# Altium PCB S1.PcbDoc
Units mil, origin at the board's own origin, x right, y up, seen from the top; angles counter-clockwise.
Board outline 2570.51 x 2214.83 mil, 4 copper layers (Top Layer, PWR, GND, Bottom Layer), stack 23.756 mil thick; 77 components, 37 nets, 292 pads, 94 vias.
Unrouted connection lines stored in the file: 49.
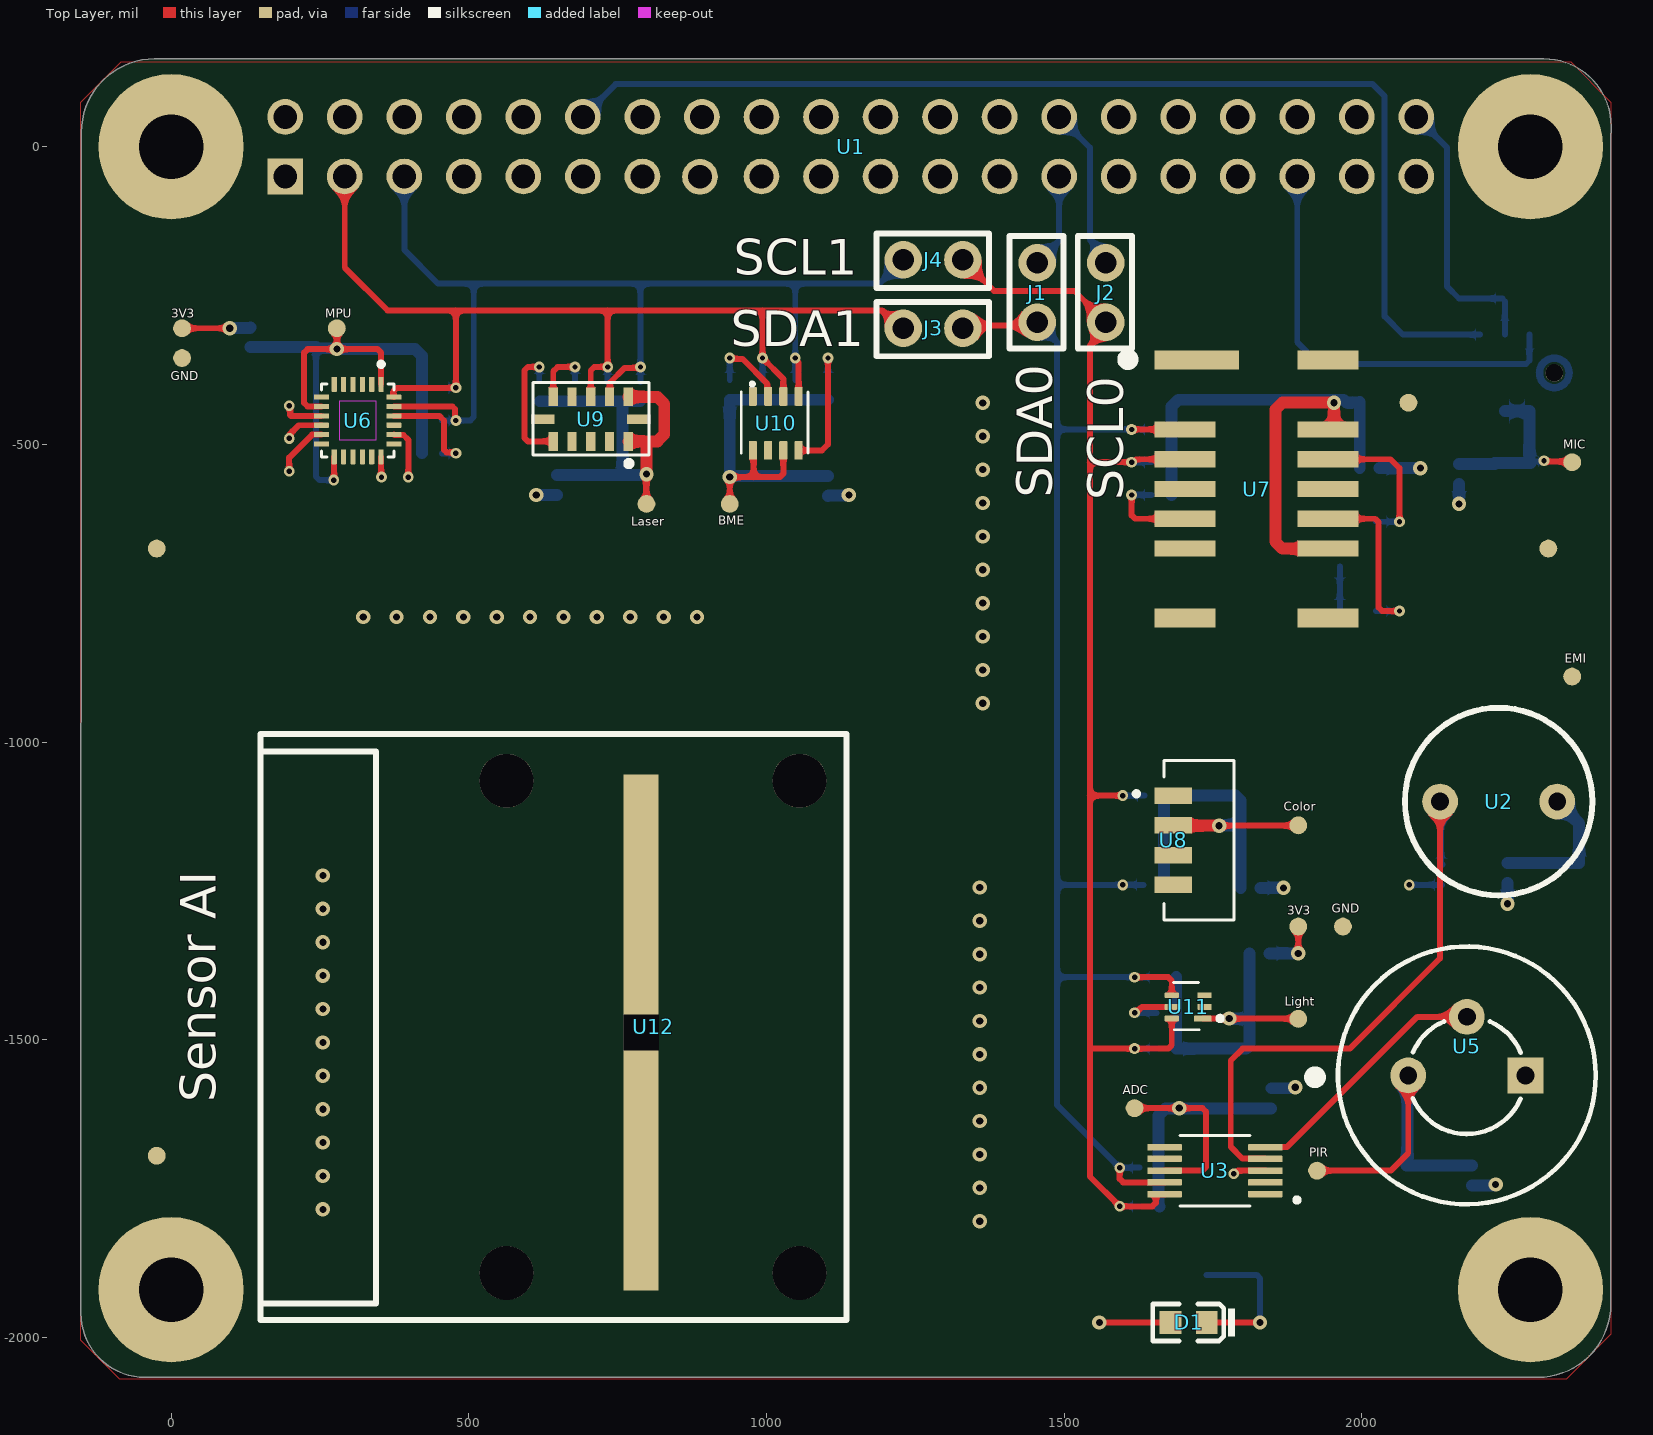
[diagram p0: Top Layer view]
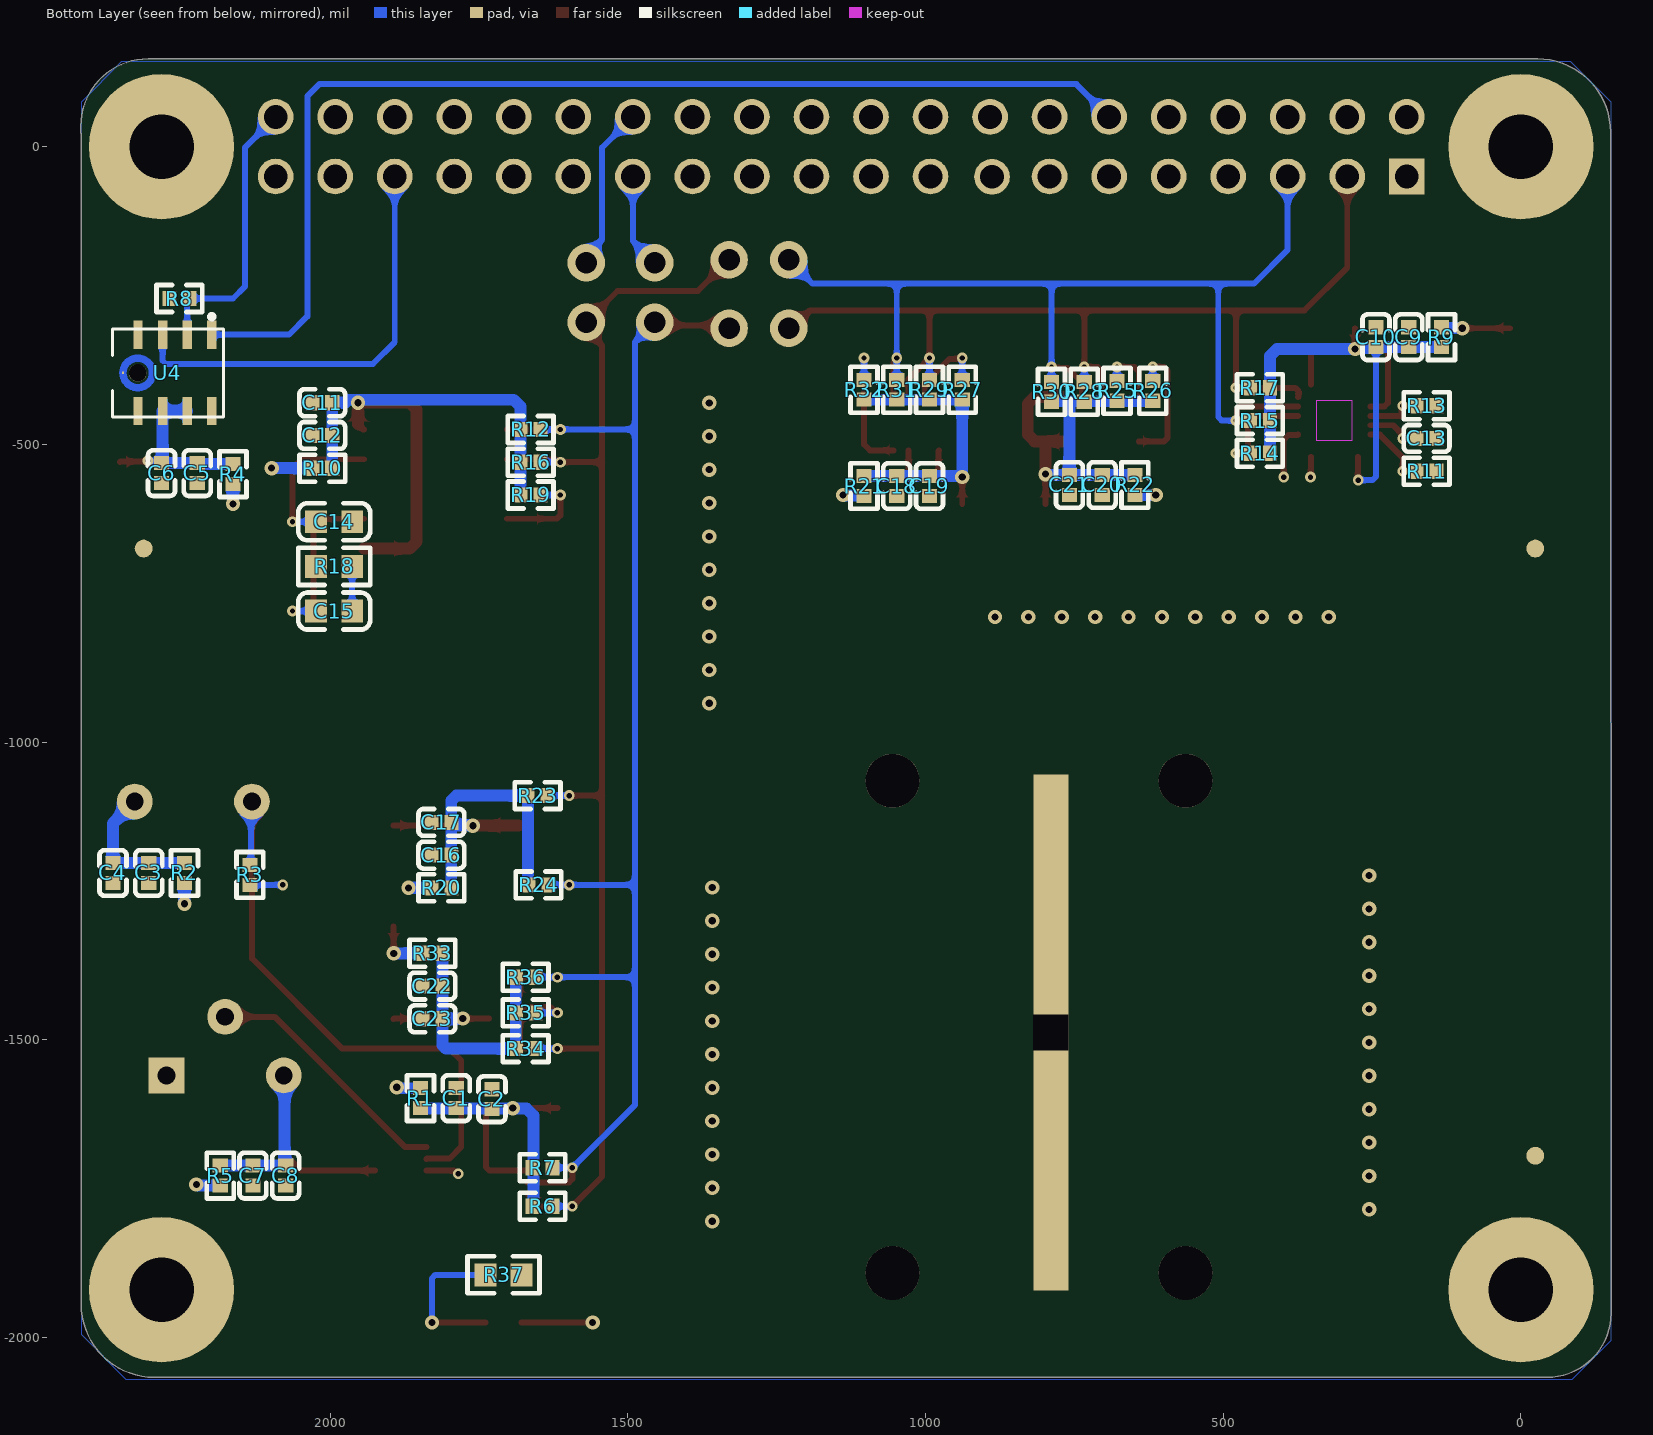
[diagram p1: Bottom Layer view, seen from below]
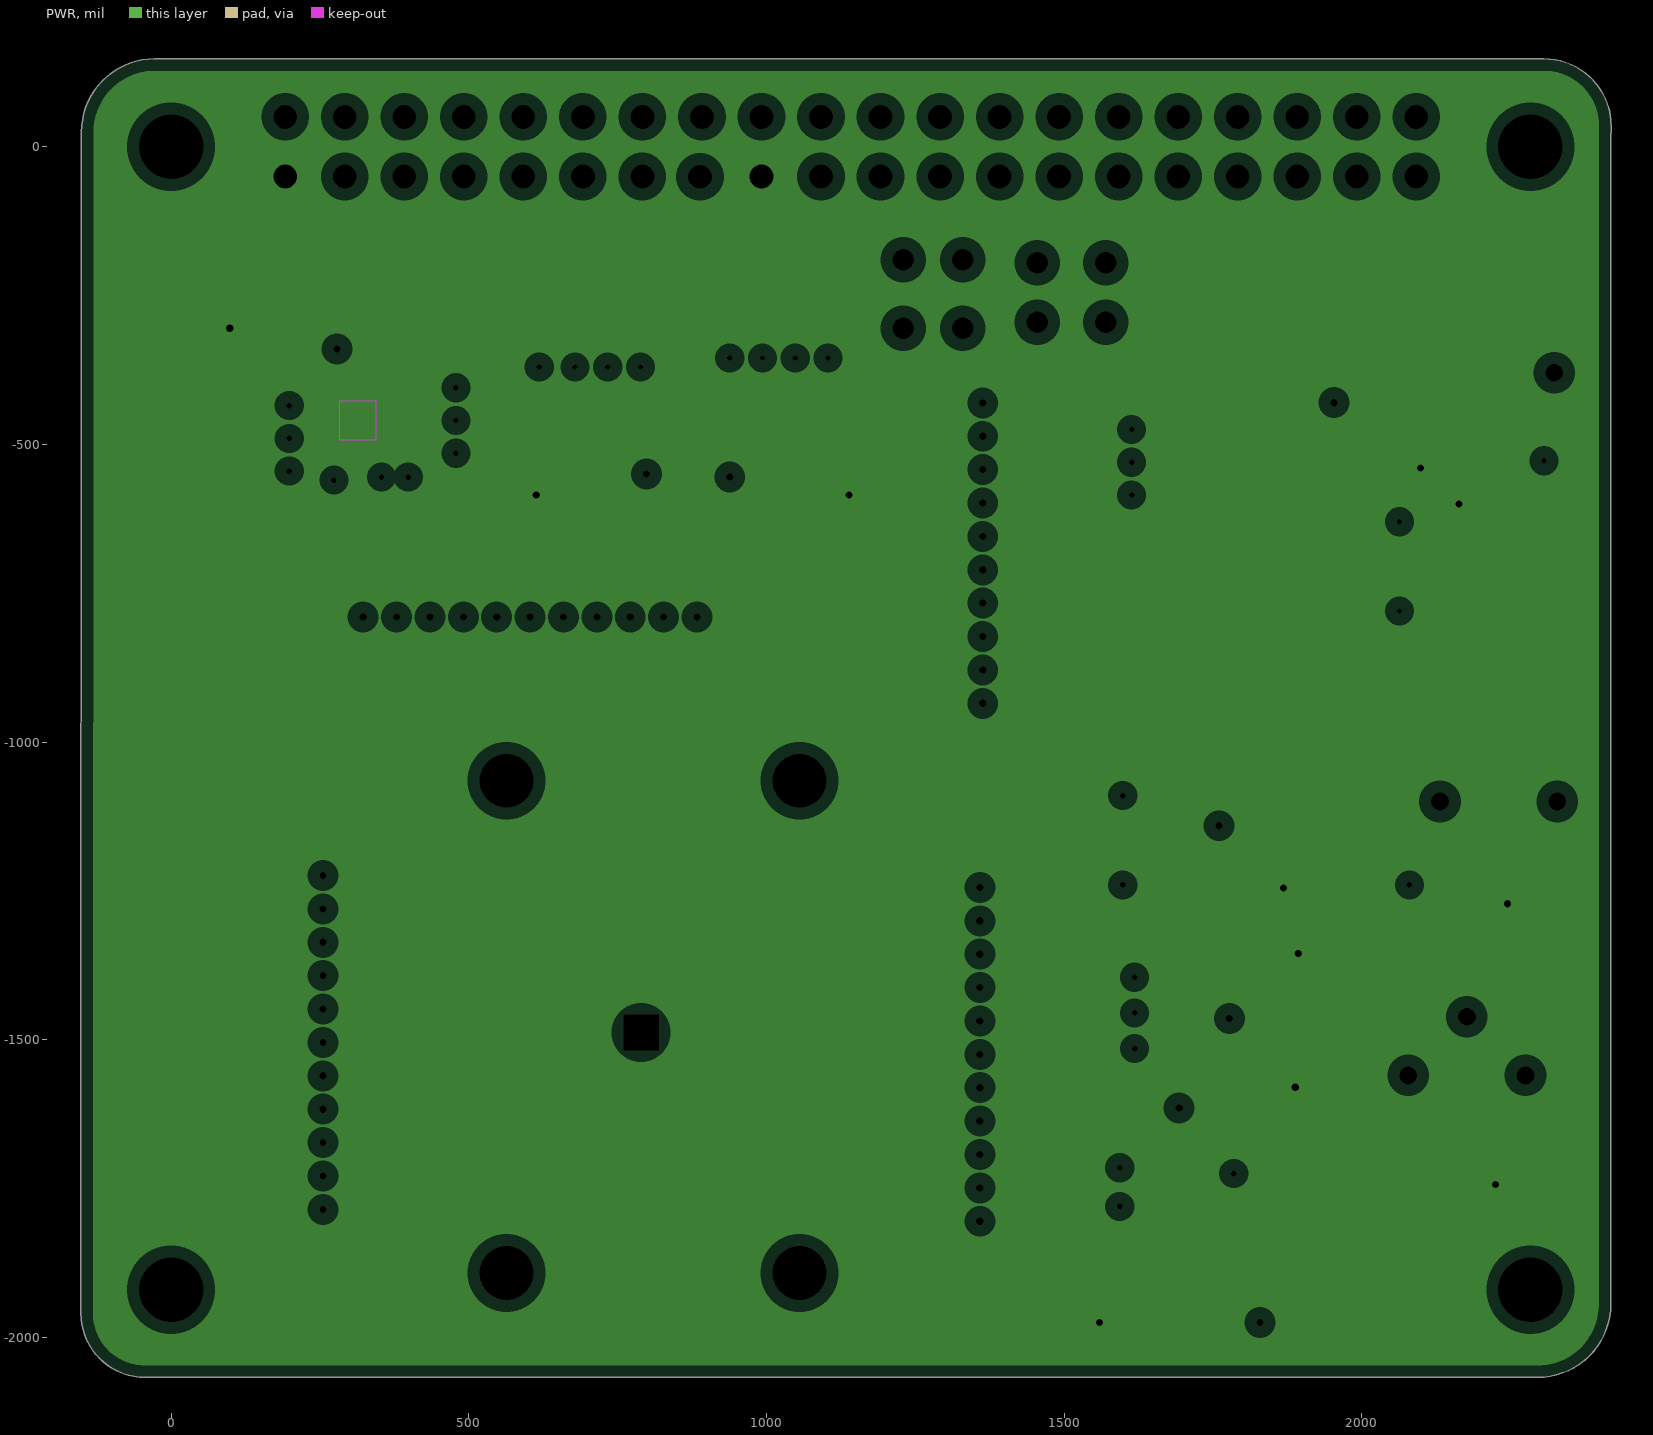
[diagram p2: PWR, clearances drawn from the general rule]
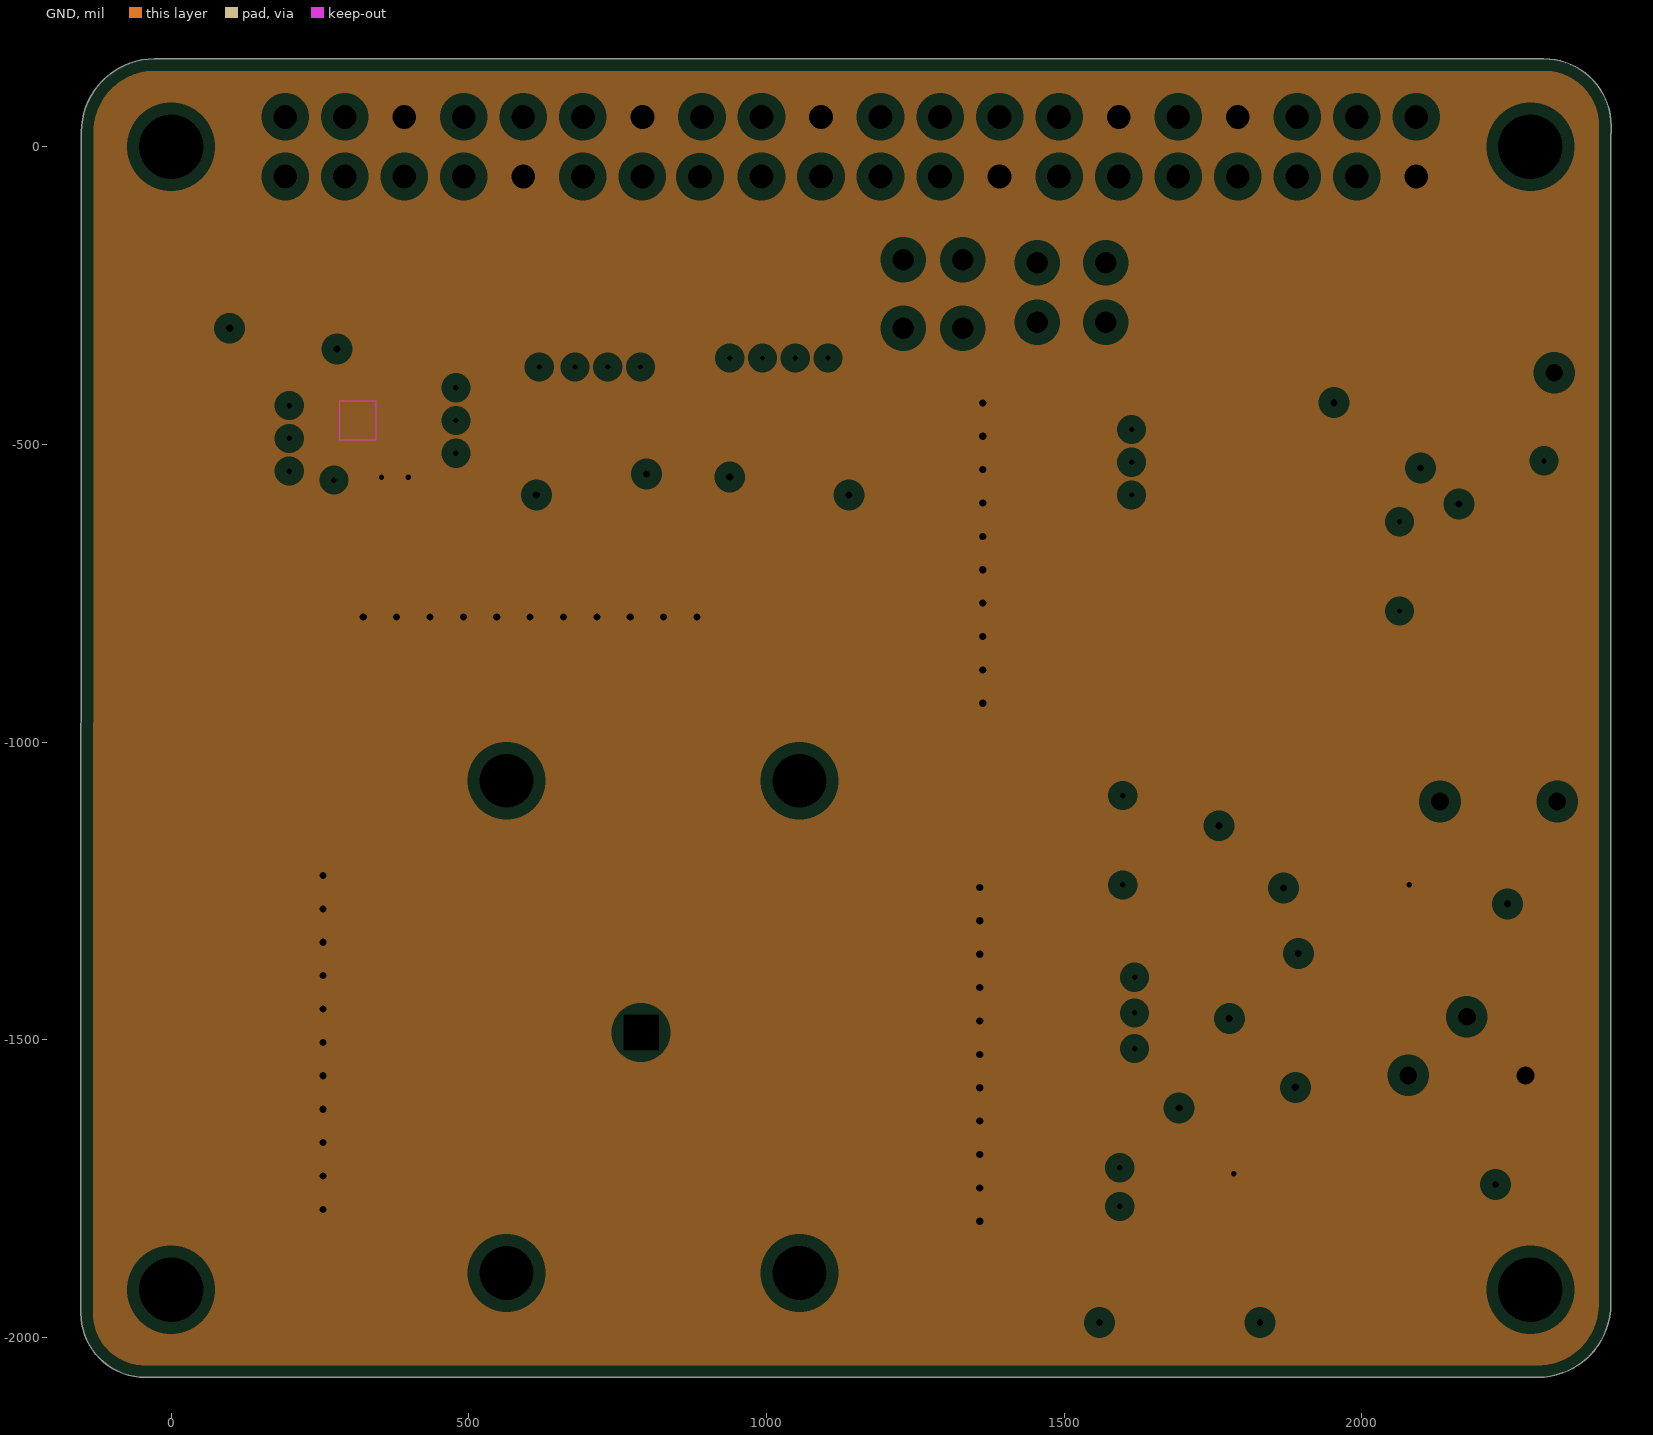
[diagram p3: GND, clearances drawn from the general rule]
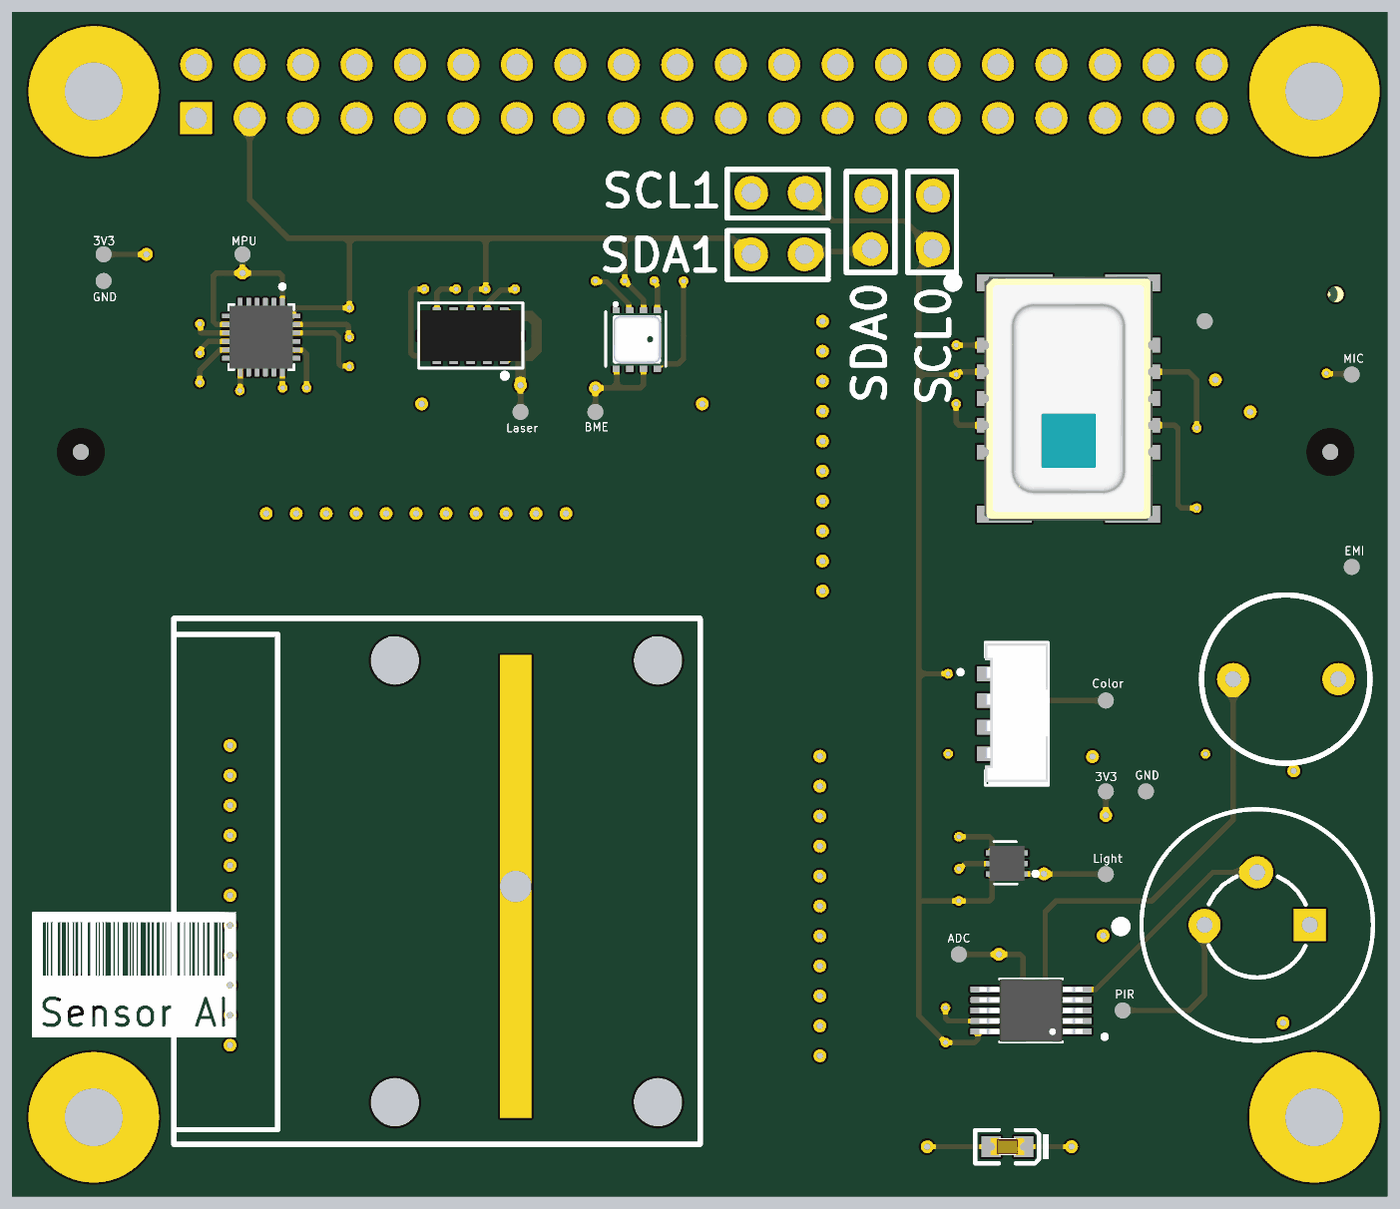
[diagram p4: 3D render of the assembled board from above, using the file's embedded part models]
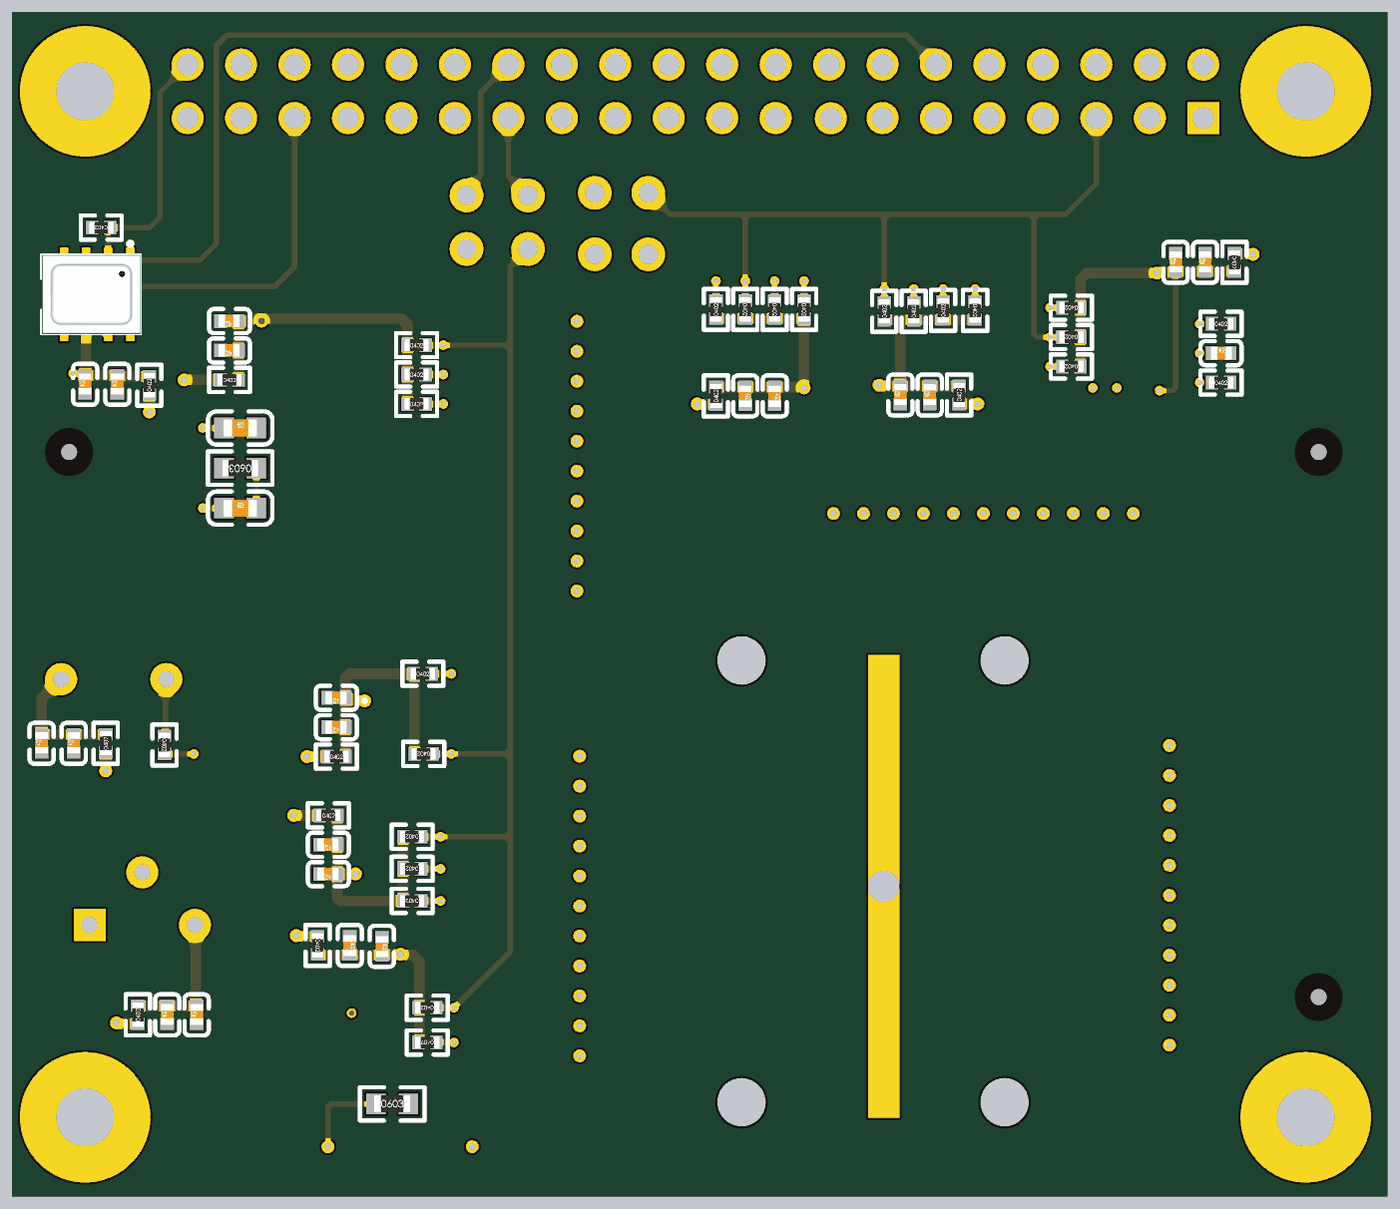
[diagram p5: 3D render of the assembled board from below, using the file's embedded part models]

## Layer stack, top to bottom
Top Solder: solder mask 0.4, Solder Resist, Dk 3.5
Top Layer: signal copper 1.4
Dielectric 2: prepreg 2.8, PP-006, Dk 4.1
PWR: plane copper 1.378, net PWR_3V3
Dielectric 1: dielectric 12.6, FR-4, Dk 4.8
GND: plane copper 1.378, net GND
Dielectric 3: prepreg 2.8, PP-006, Dk 4.1
Bottom Layer: signal copper 1.4
Bottom Solder: solder mask 0.4, Solder Resist, Dk 3.5

## Board outline
-151.53,-1959.18 ccw(c-43.5,-1959.26) -43.58,-2067.29 2295.35,-2067.29 ccw(c2295.36,-2062.27) 2295.39,-2067.29 ccw(c2295.35,-1944.17) 2418.48,-1944.17 ccw(c2413.51,-1944.17) 2418.46,-1943.7 ccw(c2413.49,-1943.23) 2418.48,-1943.23 2418.48,22.24 ccw(c2413.96,24.41) 2418.98,24.41 2418.98,34.67 ccw(c2306.1,34.67) 2306.1,147.54 -27.29,147.54 ccw(c-27.29,142.52) -27.39,147.54 cw(c-27.34,139.22) -27.29,147.54 -27.39,147.54 ccw(c-27.39,24.32) -150.61,24.42

## Design rules (kind name [scope] priority, off if disabled: settings)
Clearance [All] p1: gap=5.5 ignorepadtopadclearanceinfootprint=FALSE except(10: Arc-Fill Arc-Poly Arc-Region Track-Fill Track-Poly Track-Region SMDPad-Fill SMDPad-Poly SMDPad-Region THPad-Fill THPad-Poly THPad-Region Via-Fill Via-Poly Via-Region Fill-Fill Fill-Poly Fill-Region Poly-Poly Poly-Region Region-Region)
PlaneClearance [All] p1: clearance=20
PlaneConnect [All] p1: planeconnectstyle=Relief reliefexpansion=20 reliefentries=4 reliefconductorwidth=10 reliefairgap=10
PolygonConnect [All] p1: connectstyle=Relief reliefconductorwidth=10 reliefentries=4 polygonreliefangle="90 Angle" airgapwidth=10
RoutingVias [All] p1: holewidth=28 width=50 viastyle="Through Hole" minholewidth=28 minwidth=50 maxholewidth=28 maxwidth=50
SolderMaskExpansion [All] p1: expansion=4 istentingtop=FALSE
Width [All] p1: maxlimit=30 minlimit=10 preferedwidth=10
28 further rules are at their usual default settings.

## Classes and differential pairs
component class S2_Sensors: C1 C2 C3 C4 C5 C6 C7 C8 C9 C10 C11 C12 C13 C14 C15 C16 C17 C18 C19 C20 C21 C22 C23 R1 R2 R3 R4 R5 R6 R7 R8 R9 R10 R11 R12 R13 R14 R15 R16 R17 R18 R19 R20 R21 R22 R23 R24 R25 R26 R27 R28 R29 R30 R31 R32 R33 R34 R35 R36 U2 U3 U4 U5 U6 U7 U8 U9 U10 U11
component class S1_Interface: D1 J1 J2 J3 J4 R37 U1 U12

## Components (designator, comment, footprint, x,y, rotation, side; value= is the part's Value field where it differs from the comment)
C1 "10uF" 0402_C 1788.46,-1598.27 r270 bottom
C2 "100nF" 0402_C 1728.46,-1600 r270 bottom
C3 "10uF" 0402_C 2305,-1220 r90 bottom
C4 "100nF" 0402_C 2365,-1220 r90 bottom
C5 "10uF" 0402_C 2223.46,-548.27 r90 bottom
C6 "100nF" 0402_C 2283.46,-548.27 r90 bottom
C7 "10uF" 0402_C 2130,-1728.27 r90 bottom
C8 "100nF" 0402_C 2075,-1728.27 r90 bottom
C9 "10uF" 0402_C 188.46,-320 r90 bottom
C10 "100nF" 0402_C 243.46,-320 r90 bottom
C11 "10uF" 0402_C 2013.46,-430 r0 bottom
C12 "100nF" 0402_C 2013.46,-485 r0 bottom
C13 "100nF (104) 10% 16V" 0402_C 158.46,-490 r180 bottom
C14 "2.2uF" 0603_C 1993.46,-630 r180 bottom
C15 "1uF" 0603_C 1993.46,-780 r180 bottom
C16 "2.2uF" 0402_C 1813.46,-1190 r0 bottom
C17 "100nF" 0402_C 1813.46,-1135 r0 bottom
C18 "10uF" 0402_C 1048.46,-570 r270 bottom
C19 "100nF" 0402_C 993.46,-570 r270 bottom
C20 "4.7uF" 0402_C 703.46,-568.27 r90 bottom
C21 "100nF" 0402_C 758.46,-568.27 r90 bottom
C22 "10uF" 0402_C 1828.46,-1410 r0 bottom
C23 "100nF" 0402_C 1828.46,-1465 r0 bottom
D1 "黄灯 0603" 0603_LED_S1 1709.25,-1975 r180 top
J1 "PIN2" PIN2 1455,-195 r270 top
J2 "PIN2" PIN2 1570,-195 r270 top
J3 "PIN2" PIN2 1230,-305 r0 top
J4 "PIN2" PIN2 1230,-190 r0 top
R1 "0Ω" 0402_R 1848.46,-1598.27 r270 bottom
R2 "0Ω" 0402_R 2245,-1220 r90 bottom
R3 "100KΩ" 0402_R 2135,-1223.27 r270 bottom
R4 "0Ω" 0402_R 2163.46,-550 r90 bottom
R5 "0Ω" 0402_R 2185,-1728.27 r90 bottom
R6 "4.7KΩ" 0402_R 1643.46,-1780 r0 bottom
R7 "4.7KΩ" 0402_R 1643.46,-1715 r0 bottom
R8 "100KΩ" 0402_R 2253.46,-255 r0 bottom
R9 "0Ω" 0402_R 133.46,-320 r270 bottom
R10 "0Ω" 0402_R 2013.46,-540 r180 bottom
R11 "10KΩ (1002) ±1%" 0402_R 158.46,-545 r180 bottom
R12 "4.7KΩ" 0402_R 1663.46,-475 r180 bottom
R13 "10KΩ (1002) ±1%" 0402_R 158.46,-435 r180 bottom
R14 "10KΩ" 0402_R 438.46,-515 r0 bottom
R15 "4.7KΩ" 0402_R 438.46,-460 r0 bottom
R16 "4.7KΩ" 0402_R 1663.46,-530 r180 bottom
R17 "4.7KΩ" 0402_R 438.46,-405 r0 bottom
R18 "20Ω" 0603_R 1993.46,-705 r0 bottom
R19 "10KΩ" 0402_R 1663.46,-585 r180 bottom
R20 "4.7Ω" 0402_R 1813.46,-1245 r180 bottom
R21 "0Ω" 0402_R 1103.46,-570 r90 bottom
R22 "0Ω" 0402_R 648.46,-568.27 r90 bottom
R23 "4.7KΩ" 0402_R 1651.73,-1090 r180 bottom
R24 "4.7KΩ" 0402_R 1650.2,-1240 r0 bottom
R25 "10KΩ" 0402_R 678.46,-410 r90 bottom
R26 "10KΩ" 0402_R 618.46,-410 r270 bottom
R27 "4.7KΩ" 0402_R 938.46,-408.27 r270 bottom
R28 "4.7KΩ" 0402_R 733.46,-411.73 r90 bottom
R29 "4.7KΩ" 0402_R 993.46,-408.27 r270 bottom
R30 "4.7KΩ" 0402_R 788.46,-411.73 r90 bottom
R31 "4.7KΩ" 0402_R 1048.46,-408.27 r270 bottom
R32 "4.7KΩ" 0402_R 1103.46,-408.27 r90 bottom
R33 "100Ω" 0402_R 1828.46,-1355 r180 bottom
R34 "4.7KΩ" 0402_R 1671.73,-1515 r0 bottom
R35 "10KΩ" 0402_R 1671.73,-1455 r0 bottom
R36 "4.7KΩ" 0402_R 1671.73,-1395 r0 bottom
R37 "1KΩ (1001) ±1%" 0603_R 1708.94,-1895 r180 bottom
U1 "RPI-HAT-40PIN" RPI-HAT-40PIN 191.73,-50 r0 top locked
U2 "100mH-8x10" 100mH-8x10 2230,-1100 r180 top locked
U3 "ADS1015IDGST" ADS1015 1753.46,-1720 r180 top
U4 "INMP441" INMP441 2199.06,-315.83 r90 bottom locked
U5 "AMN21111" AMN21111 2176.57,-1560 r0 top locked
U6 "MPU9250" MPU9250 313.46,-460 r270 top
U7 "AMG8833" AMG8833 1723.15,-358.46 r0 top locked
U8 "VEML7700-TT" VEML7700-TT 1744.49,-1165 r0 top locked
U9 "VL53L1X" VL53L1X 767.95,-495 r270 top
U10 "BME280" BME280 977.28,-423.39 r90 top
U11 "ISL29125" ISL29125 1708.46,-1445 r180 top
U12 "RPI-CAM" RPI-CAM 1055.59,-1065 r0 top

## Footprints (in the part's own frame and the unit in brackets; to place one, negate y for a bottom-side part, rotate by r counter-clockwise, add the part's x,y. Pads: shape width x height; smd on the part's side, far side on the other; paste and mask are expansions set on the pad)
100mH-8x10 [mil]
  round 60 hole 30: 1(-98.43,0) 2(98.43,0)
  silkscreen extent -157,-157 157,157, body extent -157,-157 157,157, height 394
0402_C [mm]
  rect 0.6x0.65 smd mask+0.051: 1(-0.425,0) 2(0.425,0)
  silkscreen extent -0.97,-0.58 0.97,0.58, body extent -0.48,-0.3 0.52,0.3, height 0.2
0402_R [mm]
  rect 0.6x0.65 smd mask+0.051: 1(-0.425,0) 2(0.425,0)
  silkscreen extent -0.97,-0.58 0.97,0.58, body extent -0.57,-0.27 0.58,0.28, height 0.41
0603_C [mm]
  rect 0.93x0.98 smd: 1(-0.77,0) 2(0.77,0)
  silkscreen extent -1.53,-0.79 1.54,0.79, body extent -0.8,-0.4 0.8,0.4, height 0.3
0603_LED_S1 [mm]
  rect 0.93x0.98 smd: A(0.77,0) K(-0.77,0)
  silkscreen extent -1.98,-0.79 1.54,0.79, body extent -0.8,-0.4 0.8,0.4, height 0.6
0603_R [mm]
  rect 0.93x0.98 smd: 1(-0.77,0) 2(0.77,0)
  silkscreen extent -1.53,-0.79 1.54,0.79, body extent -0.85,-0.4 0.85,0.4, height 0.56
ADS1015 [mm]
  rrect25% 1.47x0.28 smd: 1(-2.15,1) 2(-2.15,0.5) 3(-2.15,0) 4(-2.15,-0.5) 5(-2.15,-1) 6(2.15,-1) 7(2.15,-0.5) 8(2.15,0) 9(2.15,0.5) 10(2.15,1)
  silkscreen extent -3.6,-1.5 1.5,1.5, body extent -2.45,-1.5 2.45,1.5, height 1.1
AMG8833 [mm]
  rect 3.6x0.8 smd: 1(0,0)
  rect 2.6x0.7 smd: 2(-0.5,-2.96) 3(-0.5,-4.23) 4(-0.5,-5.5) 5(-0.5,-6.77) 6(-0.5,-8.04) 9(5.6,-8.04) 10(5.6,-6.77) 11(5.6,-5.5) 12(5.6,-4.23) 13(5.6,-2.96)
  rect 2.6x0.8 smd: 7(-0.5,-11) 8(5.6,-11) 14(5.6,0)
  silkscreen extent -3.15,-0.17 -2.75,0.23, body extent -1.45,-11.3 6.55,0.3, height 4.3
AMN21111 [mil]
  round 60 hole 30: 1(-98.43,0) 2(0,98.43)
  rect 60x60 hole 30: 3(98.43,0)
  silkscreen extent -258,-216 217,216, body extent -217,-217 217,217, height 650
BME280 [mm]
  rrect25% 0.8x0.35 smd: 1(0.1,0) 2(0.1,-0.65) 3(0.1,-1.3) 4(0.1,-1.95) 5(-2.2,-1.95) 6(-2.2,-1.3) 7(-2.2,-0.65) 8(-2.2,0)
  silkscreen extent -2.32,-2.35 0.68,0.5, body extent -2.29,-2.24 0.21,0.26, height 1
INMP441 [mm]
  rect 1.2x0.4 smd paste-1: 1(0,0) 2(0,1.05) 3(0,2.1) 4(0,3.15) 6(-3.26,3.15) 7(-3.26,2.1) 8(-3.26,1.05) 9(-3.26,0)
  rect 0.1x0.1 smd paste-1 mask+0: 5(-1.63,3.79)
  round 0.75 hole 0.75 unplated: ""(-1.63,3.16)
  Top Layer region: 243 vertices and 0 holes, not listed, extent -2.41,2.38 -0.85,3.94
  silkscreen extent -3.51,-0.49 0.87,4.23, body extent -3.51,-0.52 0.25,4.2, height 1.05
ISL29125 [mm]
  rrect25% 0.75x0.25 smd: 1(-0.625,0.5)
  rrect25% 0.6x0.25 smd: 2(-0.7,0) 3(-0.7,-0.5) 4(0.7,-0.5) 5(0.7,0) 6(0.7,0.5)
  silkscreen extent -1.46,-1.03 0.62,0.97, body extent -0.82,-0.82 0.82,0.82, height 0.7
MPU9250 [mm]
  rrect25% 0.64x0.22 smd: 1(-1.545,1) 2(-1.545,0.6) 3(-1.545,0.2) 4(-1.545,-0.2) 5(-1.545,-0.6) 6(-1.545,-1) 13(1.545,-1) 14(1.545,-0.6) 15(1.545,-0.2) 16(1.545,0.2) 17(1.545,0.6) 18(1.545,1)
  rrect25% 0.22x0.64 smd: 7(-1,-1.545) 8(-0.6,-1.545) 9(-0.2,-1.545) 10(0.2,-1.545) 11(0.6,-1.545) 12(1,-1.545) 19(1,1.545) 20(0.6,1.545) 21(0.2,1.545) 22(-0.2,1.545) 23(-0.6,1.545) 24(-1,1.545)
  Keep-Out Layer region: 0.85,-0.77 -0.85,-0.77 -0.85,0.77 0.85,0.77
  Keep-Out Layer region: 0.85,-0.77 -0.85,-0.77 -0.85,0.77 0.85,0.77
  silkscreen extent -2.5,-1.55 1.55,1.55, body extent -1.5,-1.5 1.5,1.5, height 1
PIN2 [mm]
  round 1.6 hole 0.92: 1(0,0) 2(2.54,0)
  silkscreen extent -1.14,-1.19 3.66,1.12
RPI-CAM [mm]
  round 2.3 hole 2.3 unplated: 4(-12.5,-21) 4(-12.5,0) 4(0,-21) 4(0,0)
  rect 1.5x22 hole 1.5 square unplated: 4(-6.756,-10.744)
  silkscreen extent -23,-23 2,2
RPI-HAT-40PIN [mil]
  rect 60x60 hole 40: 1(0,0)
  round 60 hole 40: 2(0,100) 3(100,0) 4(100,100) 5(200,0) 6(200,100) 7(300,0) 8(300,100) 9(400,0) 10(400,100) 11(500,0) 12(500,100) 13(600,0) 14(600,100) 15(696.7,-0.57) 16(700,100) 17(800,0) 18(800,100) 19(900,0) 20(900,100) 21(1000,0) 22(1000,100) 23(1100,0) 24(1100,100) 25(1200,0) 26(1200,100) 27(1300,0) 28(1300,100) 29(1400,0) 30(1400,100) 31(1500,0) 32(1500,100) 33(1600,0) 34(1600,100) 35(1700,0) 36(1700,100) 37(1800,0) 38(1800,100) 39(1900,0) 40(1900,100)
  round 244.09 hole 108.27 unplated: S1(-191.73,50) S2(2091.73,50)
VEML7700-TT [mm]
  rect 1.6x0.7 smd: 1(-1.55,1.905) 2(-1.55,0.635) 3(-1.55,-0.635) 4(-1.55,-1.905)
  silkscreen extent -3.22,-3.4 1.05,3.4, body extent -1.96,-3.35 1.04,3.45, height 2.35
VL53L1X [mm]
  rect 0.8x0.4 smd: 1(0,0) 2(0,-0.8) 3(0,-1.6) 4(0,-2.4) 5(0,-3.2) 7(-1.9,-3.2) 8(-1.9,-2.4) 9(-1.9,-1.6) 10(-1.9,-0.8) 11(-1.9,0)
  rect 0.4x1 smd: 6(-0.95,-3.65) 12(-0.95,0.45)
  silkscreen extent -2.51,-4.06 1.07,0.89, body extent -2.16,-4 0.24,0.8, height 1.4

## Part data
C1 C3 C5 C7 C9 C11 C16 C18 C22: library part "0402 10uF (106) 20% 6.3V", "贴片电容", Package=0402, SuppliersPartNumber=C15525, ComponentLink1Description=供应商链接, ComponentLink1URL=http://www.szlcsc.com/product/details_16204.html, Supplier=LC
C2 C4 C6 C8 C10 C12 C13 C17 C19 C21 C23: library part "0402 100nF (104) 10% 16V", "贴片电容", Package=0402, SuppliersPartNumber=C1525, ComponentLink1Description=供应商链接, ComponentLink1URL=http://www.szlcsc.com/product/details_1877.html, Supplier=LC
C14: library part "0603 2.2uF (225) 10% 16V", "贴片电容", Package=0603, SuppliersPartNumber=C23630, ComponentLink1Description=供应商链接, ComponentLink1URL=http://www.szlcsc.com/product/details_24366.html, Supplier=LC
C15: library part "0603 1uF (105) 10% 50V", "贴片电容", Package=0603, SuppliersPartNumber=C15849, ComponentLink1Description=供应商链接, ComponentLink1URL=http://www.szlcsc.com/product/details_16531.html, Supplier=LC
C20: library part "0402 4.7uF (475) 20% 10V", "贴片电容", Package=0402, SuppliersPartNumber=C23733, ComponentLink1Description=供应商链接, ComponentLink1URL=http://www.szlcsc.com/product/details_24469.html, Supplier=LC
D1: library part "0603 黄灯", "发光二极管", Package=0603, SuppliersPartNumber=C72038, ComponentLink1Description=供应商链接, ComponentLink1URL=http://www.szlcsc.com/product/details_73147.html, Supplier=LC
R1 R2 R4 R5 R9 R10 R21 R22: library part "0402 0Ω (0R0) 1%", "贴片电阻", Package=0402, SuppliersPartNumber=C17168, ComponentLink1Description=供应商链接, ComponentLink1URL=http://www.szlcsc.com/product/details_17853.html, Supplier=LC
R3 R8: library part "0402 100KΩ (1003) 1%", "贴片电阻", Package=0402, SuppliersPartNumber=C25741, ComponentLink1Description=供应商链接, ComponentLink1URL=http://www.szlcsc.com/product/details_26484.html, Supplier=LC
R6 R7 R12 R15 R16 R17 R23 R24 R27 R28 R29 R30 R31 R32 R34 R36: library part "0402 4.7KΩ (4701) 1%", "贴片电阻", Package=0402, SuppliersPartNumber=C25900, ComponentLink1Description=供应商链接, ComponentLink1URL=http://www.szlcsc.com/product/details_26643.html, Supplier=LC
R11 R13 R14 R19 R25 R26 R35: library part "0402 10KΩ (1002) 1%", "贴片电阻", Package=0402, SuppliersPartNumber=C25744, ComponentLink1Description=供应商链接, ComponentLink1URL=http://www.szlcsc.com/product/details_26487.html, Supplier=LC
R18: library part "0603 22Ω (22R0) 1%", "贴片电阻", Package=0603, SuppliersPartNumber=C23345, ComponentLink1Description=供应商链接, ComponentLink1URL=http://www.szlcsc.com/product/details_24078.html, Supplier=LC
R20: library part "0402 10Ω (10R0) 1%", "贴片电阻", Package=0402, SuppliersPartNumber=C25077, ComponentLink1Description=供应商链接, ComponentLink1URL=http://www.szlcsc.com/product/details_25820.html, Supplier=LC
R33: library part "0402 100Ω (1000) 1%", "贴片电阻", Package=0402, SuppliersPartNumber=C25076, ComponentLink1Description=供应商链接, ComponentLink1URL=http://www.szlcsc.com/product/details_25819.html, Supplier=LC
R37: library part "0603 1KΩ (1001) 1%", "贴片电阻", Package=0603, SuppliersPartNumber=C21190, ComponentLink1Description=供应商链接, ComponentLink1URL=http://www.szlcsc.com/product/details_21904.html, Supplier=LC
U2: "Sensor 100mH"
U3: "ADC 12Bit 4Channel", Package="VSSOP-10 Texas Instruments", Availability=Good, DigiKey-Purchase-URL=https://snapeda.com/shop?store=DigiKey&id=425936, MF="Texas Instruments", Mouser-Purchase-URL=https://snapeda.com/shop?store=Mouser&id=425936, MP=ADS1015IDGST, Price=None, SnapEDA_Link=https://www.snapeda.com/parts/ADS1015IDGST/Texas%20Instruments/view-part/425936/?ref=snap, Texas_Instruments-Purchase-URL=https://snapeda.com/shop?store=Texas+Instruments&id=425936
U4: "Sensor Microphone"
U5: "Sensor PIR"
U6: "Sensor MPU"
U7: "Sensor IR"
U8: "Sensor Light", Package="SMD-4 Vishay Semiconductor", Availability=Unavailable, MF="Vishay Semiconductor", MP=VEML7700-TT, Price=None, SnapEDA_Link=https://www.snapeda.com/parts/VEML7700-TT/Vishay%20Semiconductor%20Opto%20Division/view-part/534245/?ref=snap
U9: "Sensor Laser"
U10: "Sensor T/H/B TOP View"
U11: "Sensor Color"

## Free pads (board coordinates)
  round 30 smd mask+30: 1(-24.13,-1695) 1(-24.13,-675) 1(2313.46,-675)
  round 30 smd far side mask+30: 1(-24.13,-1695) 1(-24.13,-675) 1(2313.46,-675)
  round 30 smd mask+0: 1(18.46,-355) 1(18.46,-305) 1(278.46,-305) 1(798.46,-600) 1(938.46,-600) 1(1618.46,-1615) 1(1893.46,-1465) 1(1893.46,-1310) 1(1893.46,-1140) 1(1925,-1720) 1(1968.46,-1310) 1(2078.46,-430) 1(2353.46,-890) 1(2353.46,-530)
  round 244.09 hole 108.27 unplated: 2(0,-1920) 2(2283.46,-1920)

## Via types
v1: diameter 24, hole 12, Top Layer to Bottom Layer, 62 vias
v2: diameter 18, hole 9, Top Layer to Bottom Layer, 32 vias

## Nets (pads, with @x,y where several pads share a name; then routed paths per layer and width w, separated by ;. In a path a pad name is that pad's centre, name@x,y a point inside that pad or via, vN(x,y) a via of type N, cw(c..) or ccw(c..) an arc to the next point about the centre after c; other vN are vias at no path point)
ADS_3V3: C1.2 C2.2 pad.1@1618.46,-1615 R1.2 R6.2 R7.2 U3.8 | length 671.5
  Top Layer w10: pad.1@1618.46,-1615 v1(1693.46,-1615) 1732.61,-1615 1738.46,-1620.86 1738.46,-1714.14 1732.61,-1720 U3.8
  Bottom Layer w10: R1.2@1847.6,-1615.87 R1.2
  Bottom Layer w20: R6.2 1658.46,-1778.27 1658.46,-1627.58 1670.18,-1615.87 C2.2@1728.46,-1615.87 ; v1(1693.46,-1615) 1694.23,-1615.77 1728.36,-1615.77 C2.2@1728.46,-1615.87 ; R1.2@1847.6,-1615.87 C2.2@1728.46,-1615.87
AMG_3V3: C11.1 C12.1 pad.1@2078.46,-430 R10.2 R12.1 R16.1 R19.1 U7.9 U7.13 | length 1051.3
  Top Layer w10: U7.13 1944.68,-475 U7.13@1953.46,-466.22
  Top Layer w20: U7.9 1866.67,-675 1854.95,-663.28 1854.95,-441.72 1866.67,-430 v1(1953.46,-430) U7.13@1953.46,-466.22
  Bottom Layer w20: R19.1 R16.1 R12.1 1680.2,-436.72 1691.91,-425 1969.61,-425 1974.61,-430 1995.75,-430 1996.73,-429.02 R10.2
AMN_3V3: C7.2 C8.2 pad.1@1925,-1720 R5.2 U5.1 | length 558.8
  Top Layer w10: pad.1@1925,-1720 2048.82,-1720 2078.15,-1690.67 U5.1
  Bottom Layer w10: C8.2 C8.2@2076.57,-1709.96 ; U5.1@2076.57,-1561.57 U5.1
  Bottom Layer w20: C8.2 C7.2 R5.2 ; C8.2@2076.57,-1709.96 U5.1@2076.57,-1561.57
BME_3V3: C18.1 C19.1 pad.1@938.46,-600 R21.2 R27.2 R29.2 R31.2 R32.1 U10.6 U10.8 | length 678.6
  Top Layer w10: pad.1@938.46,-600 v1(938.46,-555) 978.46,-555 ; U10.8 978.46,-511.18 978.46,-555 ; U10.6 1028.46,-549.14 1022.61,-555 978.46,-555
  Bottom Layer w20: R29.2 R27.2 v1(938.46,-555) 939.55,-555 941.28,-553.27 R21.2 ; R29.2@997.65,-425 R32.1
EMI: R3.1 U2.2 U3.4 | length 1007.8
  Top Layer w10: U3.4 1837.6,-1699.8 1799.8,-1699.8 1780,-1680 1780,-1535 1800,-1515 1980,-1515 2131.57,-1363.43 U2.2
  Bottom Layer w10: U2.2@2130.79,-1100.79 U2.2 2133.29,-1101.71 2133.29,-1204.82 R3.1 R3.1@2135.79,-1205.75
GND: C1.1 C2.1 C3.1 C4.1 C5.1 C6.1 C7.1 C8.1 C9.2 C10.2 C11.2 C12.2 C13.2 C14.2 C16.2 C17.2 C18.2 C19.2 C20.1 C21.1 C22.2 C23.2 pad.1@18.46,-355 pad.1@1968.46,-1310 R3.2 R8.2 R11.2 R13.2 R18.2 R37.2 U1.6 U1.9 U1.14 U1.20 U1.25 U1.30 U1.34 U1.39 U3.3 U4.4 U4.5 U4.6 U4.9 U5.3 U6.18 U6.20 U7.6 U8.3 U9.2 U9.3 U9.4 U9.6 U9.12 U10.1 U10.7 U11.3 | length 235
  Top Layer w10: U6.18 352.83,-554.37 v2(353.46,-555) ; U6.20 374.96,-484.29 390.36,-484.29 398.46,-492.4 v2(398.46,-555) ; v2(1785,-1725) 1787.16,-1725 1792.16,-1720 U3.3
  Bottom Layer w10: v2(2080,-1240) R3.2
  other v1: 1358.46,-1805 255,-1785 1358.46,-1748.92 255,-1728.92 1358.46,-1692.85 255,-1672.85 1358.46,-1636.77 255,-1616.77 1358.46,-1580.69 255,-1560.69 1358.46,-1524.62 255,-1504.62 1358.46,-1468.54 255,-1448.54 1358.46,-1412.47 255,-1392.47 1358.46,-1356.39 255,-1336.39 1358.46,-1300.31 255,-1280.31 1358.46,-1244.24 255,-1224.24 1363.46,-935 1363.46,-878.92 1363.46,-822.85 322.7,-790 378.78,-790 434.85,-790 490.93,-790 547.01,-790 603.08,-790 659.16,-790 715.24,-790 771.31,-790 827.39,-790 883.46,-790 1363.46,-766.77 1363.46,-710.69 1363.46,-654.62 1363.46,-598.54 1363.46,-542.47 1363.46,-486.39 1363.46,-430.31
I2C0_SCL: J2.2 J4.2 R6.1 R16.2 R23.2 R34.1 U3.10 U7.3 U8.1 U11.6 | length 2424.5
  Top Layer w10: J4.2 1382.5,-242.5 1517.5,-242.5 J2.2 1570,-307.68 1543.46,-334.22 1543.46,-530 ; v2(1598.46,-1090) 1543.46,-1090 ; v2(1613.46,-530) 1543.46,-530 ; v2@1620.63,-525 U7.3 ; U3.10@1668.31,-1759.88 1654.16,-1759.88 1654.16,-1774.02 1648.19,-1780 v2(1593.46,-1780) 1543.46,-1730 1543.46,-1517.5 ; U11.6 1680.91,-1509.14 1675.05,-1515 v2(1618.46,-1515) 1545.96,-1515 1543.46,-1517.5 ; 1543.46,-1517.5 1543.46,-1090 ; 1543.46,-1090 1543.46,-530
  Bottom Layer w10: v2(1593.46,-1780) R6.1 ; v2(1598.46,-1090) R23.2 ; v2(1613.46,-530) R16.2 ; v2(1618.46,-1515) R34.1
I2C0_SDA: J1.2 J3.2 R7.1 R12.2 R24.1 R36.1 U3.9 U7.2 U8.4 U11.4 | length 2385.5
  Top Layer w10: J3.2 1335,-300 1450,-300 J1.2 ; v2(1593.46,-1715) 1593.46,-1733.83 1599.32,-1739.68 U3.9 ; v2(1613.46,-475) U7.2 ; v2(1618.46,-1395) 1675.05,-1395 1680.91,-1400.86 U11.4
  Bottom Layer w10: J1.2 1488.46,-328.46 1488.46,-475 ; R7.1 v2(1593.46,-1715) 1488.46,-1610 1488.46,-1395 ; R24.1 v2(1598.46,-1240) 1488.46,-1240 ; R12.2 v2(1613.46,-475) 1488.46,-475 ; R36.1 v2(1618.46,-1395) 1488.46,-1395 ; 1488.46,-1395 1488.46,-1240 ; 1488.46,-1240 1488.46,-475
I2C1_SCL: J4.1 R15.2 R30.2 R31.1 U1.5 U6.23 U9.10 U10.4 | length 1885.5
  Top Layer w10: U6.23 472.61,-436.38 476.93,-440.71 476.93,-458.47 v2(478.46,-460) ; U9.10 737.28,-419.37 737.28,-396.18 761.93,-371.53 786.93,-371.53 v2(788.46,-370) ; v2(1048.46,-355) 1048.46,-357.16 1054.06,-362.76 U10.4
  Bottom Layer w10: U1.5 391.73,-173.27 448.46,-230 508.46,-230 ; R15.2 v2(478.46,-460) 502.61,-460 508.46,-454.14 508.46,-230 ; R30.2 v2(788.46,-370) 788.46,-230 ; R31.1 v2(1048.46,-355) 1048.46,-230 ; J4.1 1190,-230 1048.46,-230 ; 508.46,-230 788.46,-230 ; 788.46,-230 1048.46,-230
I2C1_SDA: J3.1 R17.2 R28.2 R29.1 U1.3 U6.24 U9.9 U10.3 | length 1795.3
  Top Layer w10: U1.3 291.73,-203.27 363.46,-275 478.46,-275 ; U6.24 374.13,-420.63 373.46,-419.96 373.46,-410.86 379.32,-405 v2(478.46,-405) 478.46,-275 ; U9.9 704.96,-375.86 710.82,-370 v2(733.46,-370) 733.46,-275 ; U10.3 1028.46,-390 v2(993.46,-355) 993.46,-275 ; J3.1 1224.24,-305 1194.24,-275 993.46,-275 ; 478.46,-275 733.46,-275 ; 733.46,-275 993.46,-275
  Bottom Layer w10: R17.2 v2(478.46,-405) ; R28.2 v2(733.46,-370) ; R29.1 v2(993.46,-355)
I2S_CLK: U1.12 U4.1 | length 1921.2
  Bottom Layer w10: U1.12 746.73,105 2018.46,105 2038.46,85 2038.46,-285 2069.29,-315.83 U4.1
I2S_DIN: R8.1 U1.40 U4.2 | length 463.8
  Bottom Layer w10: U1.40 2143.46,-1.73 2143.46,-235 2163.46,-255 R8.1 ; U4.2 R8.1@2240.39,-260
I2S_FS: U1.35 U4.3 | length 729.2
  Bottom Layer w10: U1.35 1891.73,-328.27 1928.46,-365 2275.87,-365 2281.73,-359.14 U4.3
INMP_3V3: C5.2 C6.2 pad.1@2353.46,-530 R4.2 U4.7 U4.8 | length 322
  Top Layer w10: v2(2306.1,-527.6) 2307.3,-528.8 2352.26,-528.8 pad.1@2353.46,-530
  Bottom Layer w10: C6.2 2285.87,-529.13 2304.57,-529.13 v2(2306.1,-527.6)
  Bottom Layer w20: R4.2 C5.2@2223.46,-533.27 ; C5.2 C6.2 2281.73,-529.8 U4.7 U4.8
ISL_3V3: C22.1 C23.1 pad.1@1893.46,-1465 R33.2 R34.2 R35.2 R36.2 U11.1 | length 593.8
  Top Layer w10: U11.1 1733.15,-1464.61 1777.47,-1464.61 v1(1777.59,-1464.48) 1777.85,-1464.74 1893.21,-1464.74 pad.1@1893.46,-1465
  Bottom Layer w10: v1@1778.46,-1465 v1@1783.46,-1465
  Bottom Layer w20: R36.2 R35.2 R34.2 1805.87,-1515 1811.73,-1509.14 C23.1 ; v1@1783.46,-1465 C23.1 ; R33.2 C23.1
MPU_3V3: C9.1 C10.1 pad.1@278.46,-305 R9.2 R14.1 R15.1 R17.1 U6.1 U6.8 U6.13 | length 1085.8
  Top Layer w10: U6.8 229.32,-436.38 223.46,-430.52 223.46,-345.86 229.32,-340 v1(278.46,-340) ; v2(273.46,-560) 273.78,-559.68 273.78,-521.14 U6.13 ; pad.1@278.46,-305 v1(278.46,-340) ; U6.1 352.83,-345.86 346.98,-340 v1(278.46,-340)
  Bottom Layer w10: C10.1 243.46,-554.14 249.32,-560 v2(273.46,-560)
  Bottom Layer w20: R9.2 C10.1 245.28,-338.54 275.93,-338.54 277.38,-340 v1(278.46,-340) 410.02,-340 421.73,-351.72 R17.1 R15.1 R14.1
NetC3_2: C3.2 C4.2 pad.1@2353.46,-890 R2.2 U2.1 | length 249.2
  Bottom Layer w10: C4.2@2364.02,-1203.27 C4.2
  Bottom Layer w20: R2.2 C3.2 C4.2@2364.02,-1203.27 ; U2.1@2328.43,-1110.82 U2.1 2365,-1136.57 C4.2
NetC13_1: C13.1 U6.10 | length 67
  Top Layer w10: v2(198.46,-490) 200,-488.47 200,-482.2 214.32,-467.87 U6.10
NetC14_1: C14.1 U7.12 | length 255.7
  Top Layer w10: U7.12 2048.46,-525 2063.46,-540 v2(2063.46,-630)
  Bottom Layer w10: C14.1 v2(2063.46,-630)
NetC15_1: C15.1 U7.10 | length 307.7
  Top Layer w10: U7.10 2022.61,-625 2028.46,-630.86 2028.46,-774.14 2034.32,-780 v2(2063.46,-780)
  Bottom Layer w10: C15.1 v2(2063.46,-780)
NetC15_2: C15.2 R18.1 | length 75
  Bottom Layer w10: C15.2 R18.1
NetD1_K: D1.K R37.1 | length 256.3
  Top Layer w10: D1.K v1(1829.25,-1975)
  Bottom Layer w10: R37.1 1823.39,-1895 1829.25,-1900.86 v1(1829.25,-1975)
NetR11_1: R11.1 U6.11 | length 92.9
  Top Layer w10: v2(198.46,-545) 198.46,-522.24 237.09,-483.62 U6.11
NetR13_1: R13.1 U6.9 | length 69.6
  Top Layer w10: v2(198.46,-435) 200,-436.53 200,-450.78 201.34,-452.13 U6.9
NetR14_2: R14.2 U6.22 | length 182.3
  Top Layer w10: U6.22 450.59,-452.13 458.46,-460 458.46,-509.14 462.79,-513.47 476.93,-513.47 v2(478.46,-515)
  Bottom Layer w10: R14.2 v2(478.46,-515)
NetR19_2: R19.2 U7.5 | length 159.8
  Top Layer w10: v2(1613.46,-585) 1613.46,-619.14 1619.32,-625 U7.5
  Bottom Layer w10: v2(1613.46,-585) R19.2
NetR25_2: R25.2 U9.7 | length 105.7
  Top Layer w10: U9.7 641.97,-377.35 649.32,-370 v2(678.46,-370)
  Bottom Layer w10: R25.2 v2(678.46,-370)
NetR26_1: R26.1 U9.5 | length 214.9
  Top Layer w10: v2(618.46,-370) 599.32,-370 593.46,-375.86 593.46,-489.14 599.32,-495 U9.5
  Bottom Layer w10: R26.1 v2(618.46,-370)
NetR27_1: R27.1 U10.2 | length 139.4
  Top Layer w10: v2(938.46,-355) 940,-356.53 960,-356.53 1001.47,-398.01 1001.47,-418.05 U10.2
  Bottom Layer w10: R27.1 v2(938.46,-355)
NetR32_2: R32.2 U10.5 | length 235.1
  Top Layer w10: U10.5 1093.46,-510 1103.46,-500 v2(1103.46,-355)
  Bottom Layer w10: R32.2 v2(1103.46,-355)
NetR35_1: R35.1 U11.5 | length 103.1
  Top Layer w10: v2(1618.46,-1455) 1620.63,-1455 1630.63,-1445 U11.5
  Bottom Layer w10: v2(1618.46,-1455) R35.1
PIR: U3.5 U5.2 | length 429.2
  Top Layer w10: U3.5 1874.37,-1680.63 2093.43,-1461.57 U5.2
PWR_3V3: D1.A pad.1@18.46,-305 pad.1@1893.46,-1310 R1.1 R2.1 R4.1 R5.1 R9.1 R10.1 R20.1 R21.1 R22.1 R33.1 U1.1 U1.17 | length 655.5
  Top Layer w10: pad.1@18.46,-305 v1(98.46,-305) ; v1(1559.25,-1975) D1.A ; v1(1893.46,-1355) pad.1@1893.46,-1310
  Bottom Layer w20: v1(98.46,-305) 99.23,-304.23 132.5,-304.23 R9.1 ; v1(613.46,-585) R22.1 ; R21.1 1104.43,-585.77 1137.7,-585.77 v1(1138.46,-585) ; R20.1 v1(1868.46,-1245) ; R33.1 v1(1893.46,-1355) ; R1.1 1885.85,-1581.54 1887.38,-1580 v1(1888.46,-1580) ; R10.1 v1(2098.46,-540) ; v1(2163.46,-600) R4.1 ; R5.1 2222.19,-1745 2223.92,-1743.27 v1(2225,-1743.27) ; v1(2245,-1271.73) R2.1
SCL0: J2.1 U1.28 | length 277.4
  Bottom Layer w10: U1.28 1543.46,-1.73 1543.46,-155.78 1570,-182.32 J2.1
SDA0: J1.1 U1.27 | length 162.5
  Bottom Layer w10: J1.1 1491.73,-158.27 U1.27 U1.27@1490.1,-51.63
VEML_3V3: C16.1 C17.1 pad.1@1893.46,-1140 R20.2 R23.1 R24.2 U8.2 | length 679.6
  Top Layer w10: U8.2 U8.2@1683.8,-1140.33 ; v1@1760.18,-1140.33 v1(1760.51,-1140.66) 1760.84,-1140.33 1893.13,-1140.33 pad.1@1893.46,-1140
  Top Layer w20: U8.2@1683.8,-1140.33 v1@1760.18,-1140.33
  Bottom Layer w10: R24.2 R24.2@1667.7,-1239.23 ; C17.1@1791.73,-1140 C17.1
  Bottom Layer w20: R24.2@1667.7,-1239.23 R23.1@1667.7,-1090 ; R23.1 1788.37,-1090 1796.73,-1098.36 C17.1 R20.2 ; v1@1758.46,-1140 C17.1@1791.73,-1140
VL_3V3: C20.2 C21.2 pad.1@798.46,-600 R22.2 R25.1 R26.2 R28.1 R30.1 U9.1 U9.11 | length 736.9
  Top Layer w10: pad.1@798.46,-600 v1(798.46,-550)
  Top Layer w20: U9.1 798.46,-495 ; U9.11 816.75,-420.2 828.46,-431.91 828.46,-483.28 816.75,-495 798.46,-495 ; v1(798.46,-550) 798.46,-500.86 795.54,-497.93 798.46,-495
  Bottom Layer w10: R26.2 R26.2@619.33,-427.6 ; R30.1@787.6,-427.6 R30.1
  Bottom Layer w20: R26.2@619.33,-427.6 753.46,-427.6 ; R22.2 C20.2 C21.2 ; R30.1@787.6,-427.6 753.46,-427.6 ; v1(798.46,-550) 797.38,-550 795.85,-551.54 C21.2 ; 753.46,-427.6 758.46,-432.6 C21.2
pads on no net: U1.2 U1.4 U1.7 U1.8 U1.10 U1.11 U1.13 U1.15 U1.16 U1.18 U1.19 U1.21 U1.22 U1.23 U1.24 U1.26 U1.29 U1.31 U1.32 U1.33 U1.36 U1.37 U1.38 U1.S1 U1.S2 U3.1 U3.2 U3.6 U3.7 U4. U6.2 U6.3 U6.4 U6.5 U6.6 U6.7 U6.12 U6.14 U6.15 U6.16 U6.17 U6.19 U6.21 U7.1 U7.4 U7.7 U7.8 U7.11 U7.14 U9.8 U11.2 U12.4

## Polygon pours and split planes (outlines as drawn)
GND on Bottom Layer "GND_L04_P000" (solid, remove dead copper, pour order 0): 2350.94,142.52 2418.46,75 2418.46,-1995 2343.46,-2070 -86.54,-2070 -151.54,-2005 -151.54,75 -84.01,142.52
GND on Top Layer "GND_L01_P001" (solid, remove dead copper, pour order 1): -84.01,142.52 2350.94,142.52 2418.46,75 2418.46,-1995 2343.46,-2070 -86.54,-2070 -151.54,-2005 -151.54,75
GND on GND (split plane): -27.41,127.44 -27.41,126.5 -27.34,126.47 -27.29,126.49 -27.29,126.2 -26.99,126.32 -27.01,127.44 2306.1,127.44 2306.7,127.5 2314.2,127.17 2322.23,126.12 2330.14,124.36 2337.86,121.93 2345.35,118.83 2352.53,115.09 2359.37,110.73 2365.79,105.8 2371.77,100.33 2377.24,94.36 2382.17,87.93 2386.52,81.1 2390.26,73.91 2393.36,66.43 2395.8,58.7 2397.55,50.79 2398.61,42.76 2398.94,35.27 2398.88,34.67 2398.88,27.42 2397.63,24.41 2398.6,24.41 2398.38,22.24 2398.38,-1941.79 2397.75,-1941.73 2397.13,-1943.23 2397.14,-1943.23 2398.38,-1943.23 2398.38,-1943.22 2398.38,-1943.23 2398.39,-1943.35 2398.36,-1943.7 2398.39,-1944.05 2398.38,-1944.17 2398.41,-1944.17 2398.46,-1944.67 2398.45,-1944.84 2398.38,-1944.17 2398.38,-1944.16 2397.14,-1944.16 2397.13,-1944.17 2397.75,-1945.65 2398.42,-1945.59 2398.08,-1953.16 2396.91,-1962.08 2394.96,-1970.86 2392.26,-1979.44 2388.82,-1987.75 2384.66,-1995.73 2379.83,-2003.32 2374.35,-2010.46 2368.27,-2017.09 2361.64,-2023.17 2354.5,-2028.64 2346.92,-2033.48 2338.94,-2037.63 2330.62,-2041.07 2322.04,-2043.78 2313.26,-2045.73 2304.34,-2046.9 2296.04,-2047.26 2295.39,-2047.2 2295.37,-2047.2 2295.36,-2047.2 2295.36,-2045.95 2295.25,-2045.99 2295.26,-2047.2 -43.58,-2047.2 -44.13,-2047.25 -51.17,-2046.94 -58.78,-2045.94 -66.28,-2044.28 -73.6,-2041.97 -80.7,-2039.03 -87.51,-2035.49 -93.98,-2031.36 -100.08,-2026.69 -105.74,-2021.5 -110.92,-2015.84 -115.6,-2009.75 -119.72,-2003.27 -123.27,-1996.46 -126.21,-1989.36 -128.52,-1982.04 -130.18,-1974.54 -131.18,-1966.93 -131.49,-1959.77 -131.44,-1959.19 -130.51,24.41 -130.57,25.05 -130.21,33.32 -129.04,42.24 -127.09,51.03 -124.38,59.62 -120.93,67.94 -116.78,75.93 -111.94,83.52 -106.46,90.67 -100.37,97.31 -93.73,103.39 -86.59,108.87 -79,113.71 -71.01,117.87 -62.69,121.31 -54.1,124.02 -45.31,125.97 -36.38,127.14 -28.06,127.51
GND on GND (split plane): -27.39,127.44
no net on GND (split plane): 2398.88,26.52 2398.77,26.16 2398.6,24.41 2398.77,26.16 2398.88,26.52
no net on GND (split plane): -27.29,127.44
PWR_3V3 on PWR (split plane): -27.41,127.44 -27.41,126.5 -27.34,126.47 -27.29,126.49 -27.29,126.2 -26.99,126.32 -27.01,127.44 2306.1,127.44 2306.7,127.5 2314.2,127.17 2322.23,126.12 2330.14,124.36 2337.86,121.93 2345.35,118.83 2352.53,115.09 2359.37,110.73 2365.79,105.8 2371.77,100.33 2377.24,94.36 2382.17,87.93 2386.52,81.1 2390.26,73.91 2393.36,66.43 2395.8,58.7 2397.55,50.79 2398.61,42.76 2398.94,35.27 2398.88,34.67 2398.88,27.42 2397.63,24.41 2398.6,24.41 2398.38,22.24 2398.38,-1941.79 2397.75,-1941.73 2397.13,-1943.23 2397.14,-1943.23 2398.38,-1943.23 2398.38,-1943.22 2398.38,-1943.23 2398.39,-1943.35 2398.36,-1943.7 2398.39,-1944.05 2398.38,-1944.17 2398.41,-1944.17 2398.46,-1944.67 2398.45,-1944.84 2398.38,-1944.17 2398.38,-1944.16 2397.14,-1944.16 2397.13,-1944.17 2397.75,-1945.65 2398.42,-1945.59 2398.08,-1953.16 2396.91,-1962.08 2394.96,-1970.86 2392.26,-1979.44 2388.82,-1987.75 2384.66,-1995.73 2379.83,-2003.32 2374.35,-2010.46 2368.27,-2017.09 2361.64,-2023.17 2354.5,-2028.64 2346.92,-2033.48 2338.94,-2037.63 2330.62,-2041.07 2322.04,-2043.78 2313.26,-2045.73 2304.34,-2046.9 2296.04,-2047.26 2295.39,-2047.2 2295.37,-2047.2 2295.36,-2047.2 2295.36,-2045.95 2295.25,-2045.99 2295.26,-2047.2 -43.58,-2047.2 -44.13,-2047.25 -51.17,-2046.94 -58.78,-2045.94 -66.28,-2044.28 -73.6,-2041.97 -80.7,-2039.03 -87.51,-2035.49 -93.98,-2031.36 -100.08,-2026.69 -105.74,-2021.5 -110.92,-2015.84 -115.6,-2009.75 -119.72,-2003.27 -123.27,-1996.46 -126.21,-1989.36 -128.52,-1982.04 -130.18,-1974.54 -131.18,-1966.93 -131.49,-1959.77 -131.44,-1959.19 -130.51,24.41 -130.57,25.05 -130.21,33.32 -129.04,42.24 -127.09,51.03 -124.38,59.62 -120.93,67.94 -116.78,75.93 -111.94,83.52 -106.46,90.67 -100.37,97.31 -93.73,103.39 -86.59,108.87 -79,113.71 -71.01,117.87 -62.69,121.31 -54.1,124.02 -45.31,125.97 -36.38,127.14 -28.06,127.51
PWR_3V3 on PWR (split plane): -27.39,127.44
no net on PWR (split plane): 2398.88,26.52 2398.77,26.16 2398.6,24.41 2398.77,26.16 2398.88,26.52
no net on PWR (split plane): -27.29,127.44

## Silkscreen, mask and mechanical layers (free items; w line width, h text height)
Top Overlay:
  text "SCL1" at 945,-215 h60
  text "3V3" at 0.11,-287 h15
  text "MPU" at 258.93,-287 h15
  text "SDA1" at 940,-335 h60
  text "GND" at -0.67,-392 h15
  text "MIC" at 2338.68,-507 h15
  text "SDA0" at 1480,-590 h60 r90
  text "SCL0" at 1599.69,-594 h60 r90
  text "BME" at 919.12,-635.17 h15
  text "Laser" at 772.83,-637 h15
  text "EMI" at 2341.25,-867 h15
  text "Color" at 1868.84,-1115.17 h15
  text "GND" at 1949.33,-1287 h15
  text "3V3" at 1874.94,-1290.17 h15
  text "Light" at 1870.58,-1442.71 h15
  text "ADC" at 1598.97,-1592 h15
  text "Sensor AI" at 75,-1605 h60 r90
  text "PIR" at 1911.75,-1697 h15
Mechanical 1:
  lines w10: 2413.46,-1944.17 cw(c2295.35,-1944.17) 2295.35,-2062.28 -43.58,-2062.28 cw(c-43.5,-1959.26) -146.52,-1959.18 -145.59,24.41 cw(c-27.39,24.32) -27.29,142.52 2306.1,142.52 cw(c2306.1,34.67) 2413.96,34.67 2413.96,24.41 ; 2413.46,-1943.23 2413.46,29.54